# EAGLE board dig-power (EAGLE 5.07)

Size 100 x 80 mm. Coordinates in mm from the lower left corner, seen from the top.
Outline: 0,0 100,0 100,80 0,80 0,0
Copper layers (1*16): Top 0.035mm / dielectric 1.5mm / Bottom 0.035mm
Design rules "default": minimum track width 10mil, minimum drill 24mil, track to track 8mil, track to pad 8mil, pad to pad 8mil, via to via 8mil, smd to smd 8mil, copper to edge 40mil, drill to drill 8mil, minimum pad ring 10mil, minimum via ring 8mil, stop-mask expansion 4mil, vias tented up to drill 0mil, thermal gap 10mil

## Footprints (pad centres in the part's own frame; a part is rotated, then mirrored left to right if it is on the bottom)
1KAB = drill 1.016 octagon: + 2.54,-2.54; - -2.54,2.54; AC1 -2.54,-2.54; AC2 2.54,2.54
C025-025X050 = drill 0.813 octagon: 1 -1.27,0; 2 1.27,0
E5-8,5 = drill 1.016 pad 2.54 round: + -2.54,0 | drill 1.016 pad 2.54 octagon: - 2.54,0
DO35-7 = drill 0.813 long: A 3.81,0; C -3.81,0
1X01 = drill 1.016 octagon: 1 0,0
TO220V = drill 1.016 long: 1 -2.54,-2.54; 2 0,-2.54; 3 2.54,-2.54
1X04 = drill 1.016 long: 1 -3.81,0; 2 -1.27,0; 3 1.27,0; 4 3.81,0
351 = drill 1.016 long: 1 -3.81,-3.81; 16 -3.81,3.81; O1 8.89,-3.81; O2 8.89,3.81; P1 3.81,-3.81; P2 3.81,3.81; S1 13.97,-3.81; S2 13.97,3.81
0204/5 = drill 0.813 octagon: 1 -2.54,0; 2 2.54,0
TO220 = drill 1.118 long: 1 -2.54,-6.35; 2 0,-6.35; 3 2.54,-6.35 | hole 3.302: 0,11.176
EI38-2 = drill 1.118 pad 3.81 octagon: 1 -12.497,10.008; 5 -12.497,-10.008; 6 12.497,-10.008; 7 12.497,-5.004; 9 12.497,5.004; 10 12.497,10.008

## Placement (x,y rotation side)
B1  [1KAB]  59.69,59.69 180 top
C1  u33  [C025-025X050]  62.23,16.51 180 top
C2  u33  [C025-025X050]  62.23,29.21 180 top
C17  u33  [C025-025X050]  58.42,41.91 0 top
C18  4700u  [E5-8,5]  59.69,49.53 0 top
D1  1N4148DO35-7  [DO35-7]  41.91,22.86 270 top
EARTH  [1X01]  3.81,40.64 0 top
IC2  7805TV  [TO220V]  60.96,25.4 0 top
IC3  7815TV  [TO220V]  60.96,36.83 0 top
JP4  [1X04]  68.58,21.59 270 top
K1  351  [351]  31.75,22.86 180 top
MAINS1  [1X01]  3.81,62.23 0 top
MAINS2  [1X01]  3.81,53.34 0 top
R1  [0204/5]  60.96,8.89 180 top
SUPP_POWER1  [1X01]  3.81,26.67 0 top
SUPP_POWER2  [1X01]  3.81,19.05 0 top
T1  TIP32C  [TO220]  35.56,10.16 90 top
TR1  [EI38-2]  30.48,52.07 0 top

## Library data of the parts
B1 = rectifier
C1 C2 C17 C18 R1 = resistor
D1 = diode
EARTH JP4 MAINS1 MAINS2 SUPP_POWER1 SUPP_POWER2 = pinhead
IC2 IC3 = linear
K1 = relay
T1 = transistor
TR1 = trafo

## Nets
0V: B1.- C1.2 C2.2 C17.2 C18.- D1.A IC2.2 IC3.2 JP4.2 K1.16
+5V: C1.1 IC2.3 JP4.4
+9V: C2.1 IC3.3 JP4.1 T1.3
N$1: D1.C K1.1 T1.2
N$2: K1.S2 MAINS1.1 TR1.1
N$3: R1.2 T1.1
N$4: K1.S1 MAINS2.1 TR1.5
N$5: K1.P1 SUPP_POWER1.1
N$6: K1.P2 SUPP_POWER2.1
N$24: B1.AC1 TR1.10
N$25: B1.AC2 TR1.9
N$26: B1.+ C17.1 C18.+ IC2.1 IC3.1
STANDBY: JP4.3 R1.1

## Tracks (layer width: path | path; a pad name or v marks a point on that pad's centre or on a via)
0V  (9 unrouted)
+5V  (2 unrouted)
+9V  (3 unrouted)
N$1  (2 unrouted)
N$2  (2 unrouted)
N$3  (1 unrouted)
N$4  (2 unrouted)
N$5  (1 unrouted)
N$6  (1 unrouted)
N$24  (1 unrouted)
N$25  (1 unrouted)
N$26  (4 unrouted)
STANDBY  (1 unrouted)